# Altium PCB 32最小系统板.PcbDoc
Units mil, origin at the board's own origin, x right, y up, seen from the top; angles counter-clockwise.
Board outline 2100 x 900 mil, 2 copper layers (Top Layer, Bottom Layer); 14 components, 51 nets, 127 pads, 17 vias.
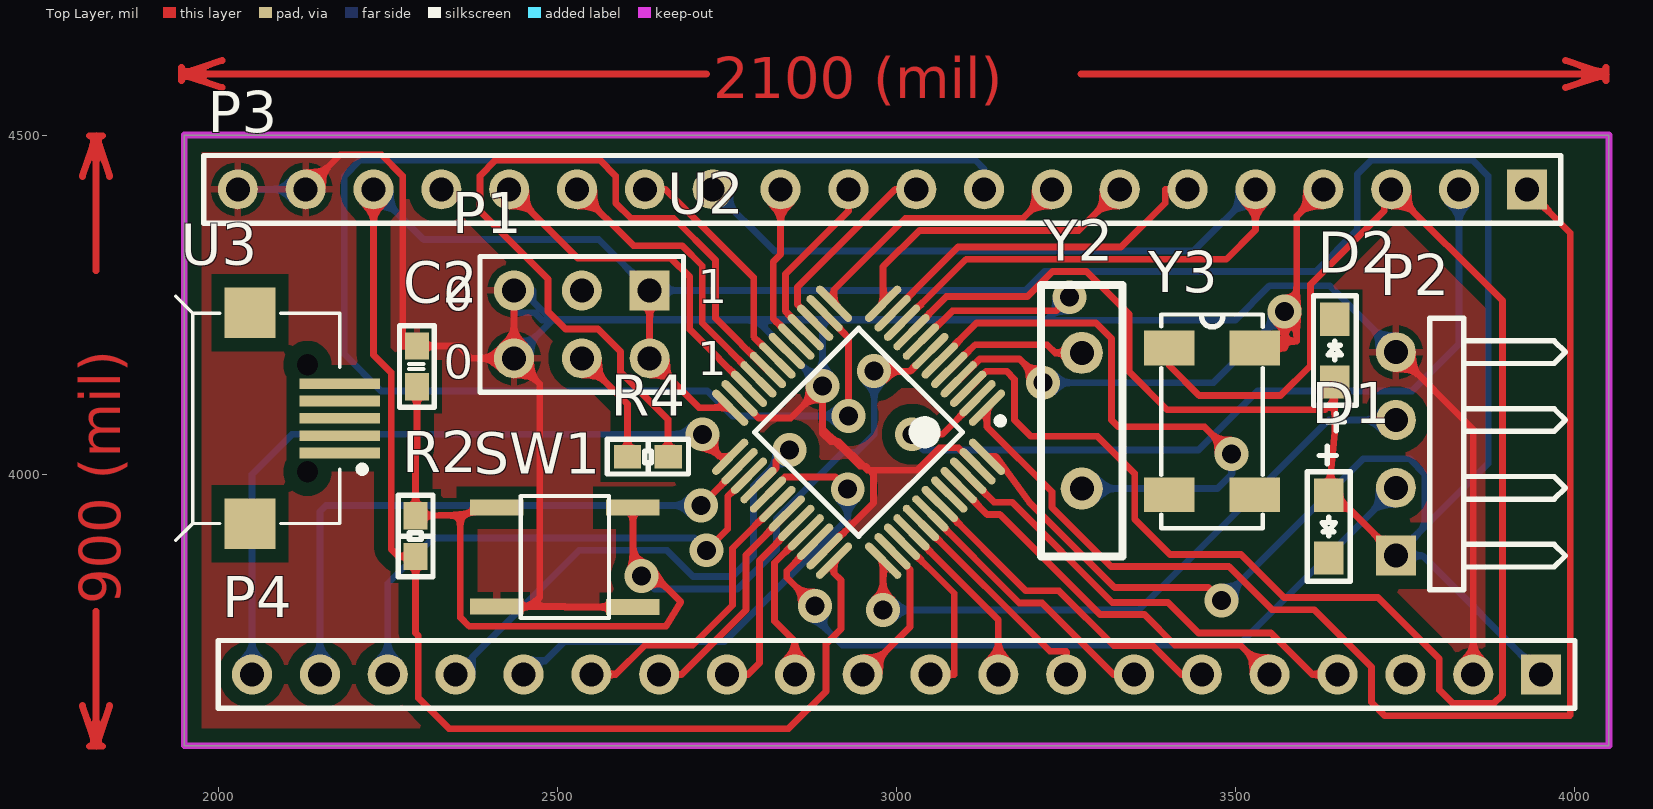
[diagram p0: Top Layer view]
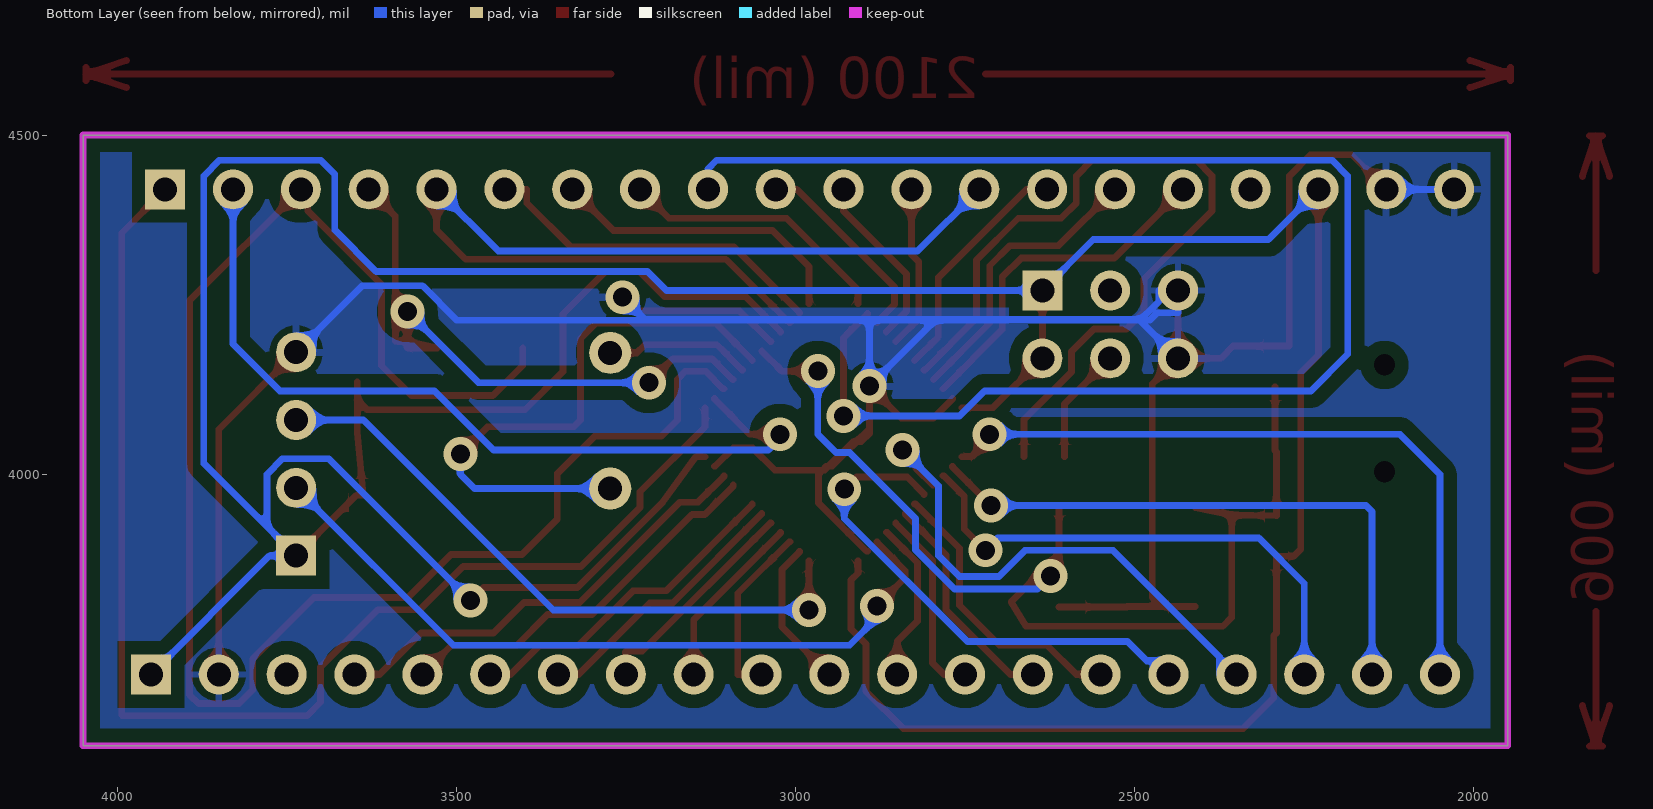
[diagram p1: Bottom Layer view, seen from below]

## Layer stack, top to bottom
Top Solder: solder mask 0.4, Solder Resist, Dk 3.5
Top Layer: signal copper 1.4
Dielectric 1: dielectric 12.6, FR-4, Dk 4.8
Bottom Layer: signal copper 1.4
Bottom Solder: solder mask 0.4, Solder Resist, Dk 3.5

## Board outline
1950,3600 4050,3600 4050,4500 1950,4500

## Design rules (kind name [scope] priority, off if disabled: settings)
Clearance [All] p1: gap=20 ignorepadtopadclearanceinfootprint=FALSE
PolygonConnect [All] p1: connectstyle=Relief reliefconductorwidth=10 reliefentries=4 polygonreliefangle="90 Angle" airgapwidth=10
RoomDefinition 32最小系统板 [InComponentClass('32最小系统板')] p1: confinementstyle=ConfineIn formatcopy=TRUE lockcomponents=FALSE outline 0,0 2000,0 2000,1000 0,1000
RoutingVias [All] p1: holewidth=28 width=50 viastyle="Through Hole" minholewidth=28 minwidth=50 maxholewidth=28 maxwidth=50
SolderMaskExpansion [All] p1: expansion=4 istentingtop=FALSE
Width [All] p1: maxlimit=10 minlimit=10 preferedwidth=10
30 further rules are at their usual default settings.

## Components (designator, comment, footprint, x,y, rotation, side; value= is the part's Value field where it differs from the comment)
C2 "105,0603" C0603 2293,4159 r270 top value=104
D1 "LED" LED 3637,3923 r90 top
D2 "LED" LED 3646,4182.26 r270 top
P1 "Header 3X2" HDR2X3 2636,4271 r180 top
P2 "SWD" HDR1X4H 3736,3880 r90 top
P3 "Header 20" HDR1X20 3929,4420 r180 top
P4 "Header 20" HDR1X20 3950,3705 r180 top
R2 "10K,0603" R0603 2291,3909 r270 top
R4 "10K,0603" R0603 2633.48,4026 r0 top
SW1 "SW-PB_V" KEY-SMT 2511,3878 r0 top
U2 "STM32F103C8T6" 48P 2944,4062 r225 top
U3 "USB-mrico" Micro_USB 2113.1,4082.49 r270 top
Y2 "8MHz" XTAL1 3273,4179 r270 top
Y3 "32.768K" MC-306 3465,4078 r270 top

## Footprints (in the part's own frame and the unit in brackets; to place one, negate y for a bottom-side part, rotate by r counter-clockwise, add the part's x,y. Pads: shape width x height; smd on the part's side, far side on the other; paste and mask are expansions set on the pad)
48P [mm]
  oval 1.8x0.3 smd: 1(-4.05,2.75) 2(-4.05,2.25) 3(-4.05,1.75) 4(-4.05,1.25) 5(-4.05,0.75) 6(-4.05,0.25) 7(-4.05,-0.25) 8(-4.05,-0.75) 9(-4.05,-1.25) 10(-4.05,-1.75) 11(-4.05,-2.25) 12(-4.05,-2.75) 25(4.05,-2.75) 26(4.05,-2.25) 27(4.05,-1.75) 28(4.05,-1.25) 29(4.05,-0.75) 30(4.05,-0.25) 31(4.05,0.25) 32(4.05,0.75) 33(4.05,1.25) 34(4.05,1.75) 35(4.05,2.25) 36(4.05,2.75)
  oval 0.3x1.8 smd: 13(-2.75,-4.05) 14(-2.25,-4.05) 15(-1.75,-4.05) 16(-1.25,-4.05) 17(-0.75,-4.05) 18(-0.25,-4.05) 19(0.25,-4.05) 20(0.75,-4.05) 21(1.25,-4.05) 22(1.75,-4.05) 23(2.25,-4.05) 24(2.75,-4.05) 37(2.75,4.05) 38(2.25,4.05) 39(1.75,4.05) 40(1.25,4.05) 41(0.75,4.05) 42(0.25,4.05) 43(-0.25,4.05) 44(-0.75,4.05) 45(-1.25,4.05) 46(-1.75,4.05) 47(-2.25,4.05) 48(-2.75,4.05)
  silkscreen extent -4.17,-2.75 2.75,3.57, body extent -3.5,-3.5 3.5,3.5, height 1.6
C0603 [mil]
  rect 40x35 smd: 1(-29.92,0) 2(29.92,0)
  silkscreen extent -60,-26 60,26
HDR1X4H [mm] "Connector; Header; 4 Position; Right Angle"
  rect 1.5x1.5 hole 0.9: 1(0,0)
  round 1.5 hole 0.9: 2(2.54,0) 3(5.08,0) 4(7.62,0)
  silkscreen extent -1.27,-6.35 8.89,-1.27
HDR1X20 [mm] "Connector; Header; 20 Position"
  rect 1.5x1.5 hole 0.9: 1(0,0)
  round 1.5 hole 0.9: 2(2.54,0) 3(5.08,0) 4(7.62,0) 5(10.16,0) 6(12.7,0) 7(15.24,0) 8(17.78,0) 9(20.32,0) 10(22.86,0) 11(25.4,0) 12(27.94,0) 13(30.48,0) 14(33.02,0) 15(35.56,0) 16(38.1,0) 17(40.64,0) 18(43.18,0) 19(45.72,0) 20(48.26,0)
  silkscreen extent -1.27,-1.27 49.53,1.27
HDR2X3 [mm] "Connector; Header; 3x2 Position"
  rect 1.5x1.5 hole 0.9: 1(0,0)
  round 1.5 hole 0.9: 2(0,2.54) 3(2.54,0) 4(2.54,2.54) 5(5.08,0) 6(5.08,2.54)
  silkscreen extent -1.27,-1.27 6.35,3.81
KEY-SMT [mm]
  rect 2x0.6 smd: 1(-2.55,-1.85) 1(2.55,-1.87) 2(-2.55,1.85) 2(2.55,1.85)
  silkscreen extent -1.65,-2.29 1.65,2.29
LED [mil]
  rect 49x43 smd: 1(46.26,0) 2(-46.26,0)
  silkscreen extent -81,-31 118,31
MC-306 [mm]
  rect 1.3x1.9 smd: 1(-2.75,-1.6) 2(2.75,-1.6) 3(2.75,1.6) 4(-2.75,1.6)
  silkscreen extent -4,-1.9 4,1.9
Micro_USB [mm]
  rect 0.4x3 smd: 1(1.3,1.679) 2(0.65,1.679) 3(0,1.679) 4(-0.65,1.679) 5(-1.3,1.679)
  round 0 hole 0.8 unplated: MH1(2,0.471) MH2(-2,0.471)
  rect 1.9x1.9 smd: ""(-3.95,-1.679) ""(3.95,-1.679)
  silkscreen extent -4.57,-4.46 4.57,2.64
R0603 [mil]
  rect 40x35 smd: 1(-29.92,0) 2(29.92,0)
  silkscreen extent -60,-26 60,26
XTAL1 [mil]
  round 62 hole 35.43: 1(0,0) 2(200,0)
  silkscreen extent -100,-60 300,60

## Part data
C2: library part Cap, "Capacitor", LatestRevisionDate=17-Jul-2002, LatestRevisionNote="Re-released for DXP Platform.", Published=8-Jun-2000, Publisher="Altium Limited"
P1: "Header, 3-Pin, Dual row", LatestRevisionDate=17-Jul-2002, LatestRevisionNote="Re-released for DXP Platform.", Publisher="Altium Limited"
P2: library part "Header 4", "Header, 4-Pin", LatestRevisionDate=17-Jul-2002, LatestRevisionNote="Re-released for DXP Platform.", Publisher="Altium Limited"
P3 P4: "Header, 20-Pin", LatestRevisionDate=17-Jul-2002, LatestRevisionNote="Re-released for DXP Platform.", Publisher="Altium Limited"
R2 R4: library part Res2, "Resistor", LatestRevisionDate=17-Jul-2002, LatestRevisionNote="Re-released for DXP Platform.", Published=8-Jun-2000, Publisher="Altium Limited"
SW1: "SWITCH"
U3: library part usb-STM
Y2 Y3: library part XTAL, "Crystal Oscillator", LatestRevisionDate=17-Jul-2002, LatestRevisionNote="Re-released for DXP Platform.", Published=8-Jun-2000, Publisher="Altium Limited"

## Via types
v1: diameter 50, hole 28, Top Layer to Bottom Layer, 17 vias

## Nets (pads, with @x,y where several pads share a name; then routed paths per layer and width w, separated by ;. In a path a pad name is that pad's centre, name@x,y a point inside that pad or via, vN(x,y) a via of type N, cw(c..) or ccw(c..) an arc to the next point about the centre after c; other vN are vias at no path point)
5v: P4.3
BOOT0: U2.44
BOOT1: R4.2 U2.20 | length 1192.7
  Top Layer w10: R4.2 2663,4026.4 2663,4081 2593,4151 2593,4181 2560,4214 2512,4214 2486,4240 2486,4288 2386,4388 2386,4440 2409,4463 2563,4463 2586,4440 2586,4400 2608.53,4377.47 2671.58,4377.47 2733,4316.05 2733,4230.14 2809.27,4153.87 U2.20
GND: C2.1 P1.5 P1.6 P2.4 P3.19 P3.20 P4.2 SW1.1 U2.8 U2.23 U2.35 U2.47 | length 5478.2
  Top Layer w10: P3.19 2180,4471 2241,4471 2272,4440 2272,4188.92 C2.1 2355,4188.92 2372.92,4171 P1.6 ; SW1.1@2410.61,3805.17 2460,3805.17 ; P1.5 P1.6 ; SW1.1@2611.39,3804.38 2511.58,3804.38 2510.79,3805.17 2460,3805.17 ; U2.23 2768.62,4111.01 2796.63,4083 2844,4083 v1(2891,4130) 2891,4067 ; U2.35 2894.99,3886.62 2966,3957.63 2966,4000 2960,4006 ; U2.8 3036.97,4195.63 3082.34,4241 3235,4241 v1(3255,4261) ; U2.47 3118.29,4011.89 3091.18,4039 3063,4039 3030,4006 2960,4006 ; P2.4 3850,4066 P4.2 ; P1.6 2474,4133 2474,3819.17 2460,3805.17 ; 2891,4067 2910,4048 ; 2891,4067 2891,4060 2903,4048 2910,4048 ; 2910,4048 2915,4048 2951,4012 ; 2910,4048 2946,4012 2951,4012 ; 2951,4012 2957,4006 2960,4006 ; 2951,4012 2954,4012 2960,4006
  Bottom Layer w10: P3.20 P3.19 ; P1.6 2492,4227 ; v1(3255,4261) 3222,4228 2491,4228 ; P2.4 3638,4278 3550,4278 3499,4227 2891,4227 ; 2491,4227 2492,4227 ; 2491,4227 2478,4227 2467,4238 2436,4238 P1.5 2464,4271 2464,4255 2491,4228 ; 2491,4227 2491,4228 ; 2491,4228 2492,4227 ; 2492,4227 2794,4227 ; 2794,4227 2891,4227 ; 2794,4227 v1(2891,4130) 2891,4227
NetC7_2: 
NetD1_K: D1.2
NetD2_K: D2.2
NetP1_3: P1.3
NetP1_4: P1.4 R4.1 | length 173
  Top Layer w10: P1.4 2603.56,4103.44 R4.1
NetR9_2: 
NetR11_2: 
NRST: P3.17
OSCIN: U2.5 Y2.1 | length 215.7
  Top Layer w10: U2.5 3078.73,4153.87 3115.86,4191 3222,4191 3234,4179 Y2.1
OSCOUT: U2.6 Y2.2 | length 863.7
  Top Layer w10: U2.6 3063.71,4168.89 3117.82,4223 3294,4223 3317,4200 3317,4080 3327,4070 3454,4070 v1(3494,4030)
  Bottom Layer w10: Y2.2 3473,3979 3494,4000 v1(3494,4030)
PA0: P3.5 P3.13 U2.10 | length 1512.9
  Top Layer w10: U2.10 3009.13,4223.47 3102.66,4317 3486,4317 3529,4360 P3.5
  Bottom Layer w10: P3.13 2820,4329 3438,4329 P3.5
PA1: P3.6 U2.11 | length 522.9
  Top Layer w10: U2.11 2994.11,4238.48 3090.63,4335 3331,4335 3396,4400 3396,4420 P3.6
PA2: P3.7 U2.12 | length 450.8
  Top Layer w10: U2.12 2980.19,4306.06 3033.6,4359.47 3268.47,4359.47 P3.7
PA3: P3.8 U2.13 | length 403.2
  Top Layer w10: U2.13 2907.81,4272 3013.28,4377.47 3186.47,4377.47 P3.8
PA4: P3.9 U2.14 | length 2197.5
  Top Layer w10: U2.14 2893.89,4236.29 2929,4201.18 v1(2929,4086)
  Bottom Layer w10: v1(2929,4086) 2758,4086 2721,4123 2240,4123 2186,4177 2186,4440 2209,4463 3116,4463 3129,4450 P3.9
PA5: P3.10 U2.15 | length 297.9
  Top Layer w10: U2.15 2879.97,4224.56 2854.1,4250.43 2854.1,4276.1 2998,4420 P3.10
PA6: P3.11 U2.16 | length 261.3
  Top Layer w10: U2.16 2866.05,4210.64 2836.1,4240.59 2836.1,4295.17 2929,4388.07 P3.11
PA7: P3.12 U2.17 | length 243
  Top Layer w10: P3.12 2829,4324.07 2818.1,4313.17 2818.1,4229.66 U2.17
PA8: P4.16 U2.29 | length 764.4
  Top Layer w10: U2.29 2810.37,3971.23 2835.14,3996 2910,3996 v1(2928,3978)
  Bottom Layer w10: P4.16 2450,3725 2482,3725 2510.37,3753.37 2746.37,3753.37 2928,3935 v1(2928,3978)
PA9: P4.15 U2.30 | length 427.6
  Top Layer w10: P4.15 2586,3705 2629,3748 2699,3748 2758,3807 2758,3891.02 2823.19,3956.21 U2.30
PA10: P4.14 U2.31 | length 334.6
  Top Layer w10: P4.14 2683,3705 2778,3800 2778,3880.98 2838.21,3941.19 U2.31
PA11: P4.13 U2.32 | length 283.8
  Top Layer w10: P4.13 2781,3705 2797.84,3721.84 2797.84,3872.98 2852.13,3927.27 U2.32
PA12: P4.12 U2.33 | length 241.5
  Top Layer w10: P4.12 2850,3753.67 2820.14,3783.53 2820.14,3869.64 2864.95,3914.45 U2.33
PA15: P4.11 U2.38 | length 221.3
  Top Layer w10: P4.11 3020,3775 3020,3859.63 2994.11,3885.52 U2.38
PB0: U2.18
PB1: P3.14 U2.19 | length 351
  Top Layer w10: P3.14 2659.47,4420 2789.38,4290.09 2789.38,4202.7 U2.19
PB3: P4.10 U2.39 | length 263.1
  Top Layer w10: U2.39 3009.13,3900.53 3085,3824.66 3085,3705 P4.10
PB4: P4.9 U2.40 | length 262.5
  Top Layer w10: U2.40 3021.95,3913.36 3150,3785.3 P4.9
PB5: P4.8 U2.41 | length 326.7
  Top Layer w10: U2.41 3036.97,3928.37 3226.15,3739.19 3250,3739.19 P4.8
PB6: P4.7 U2.42 | length 399.1
  Top Layer w10: U2.42 3049.79,3941.19 3180.83,3810.16 3214.59,3810.16 3319.75,3705 P4.7
PB7: P4.6 U2.43 | length 491
  Top Layer w10: U2.43 3063.71,3955.11 3190.6,3828.22 3239.45,3828.22 3320.14,3747.53 3377.47,3747.53 3420,3705 P4.6
PB8: P4.5 U2.45 | length 574.7
  Top Layer w10: U2.45 3091.55,3982.95 3133.54,3940.96 3152.17,3940.96 3299.94,3793.19 3365.34,3793.19 3410.53,3748 3507,3748 P4.5
PB9: P4.4 U2.46 | length 666.5
  Top Layer w10: U2.46 3105.47,3996.87 3143.38,3958.96 3170.13,3958.96 3317.9,3811.19 3400,3811.19 3445.19,3766 3552,3766 3613,3705 P4.4
PB10: P3.15 U2.21 | length 433
  Top Layer w10: P3.15 2612,4337 2684,4337 2713.57,4307.43 2713.57,4222.83 U2.21
PB11: P3.16 U2.22 | length 520.7
  Top Layer w10: P3.16 2530,4319 2667,4319 2695.26,4290.74 2695.26,4213.3 U2.22
PB12: P4.20 U2.25 | length 1042.1
  Top Layer w10: v1(2714,4059) 2714,4051.81 2740,4025.81 U2.25
  Bottom Layer w10: P4.20 2050,4000 2109,4059 v1(2714,4059)
PB13: P4.19 U2.26 | length 887
  Top Layer w10: v1(2711.82,3954) 2768.62,4010.79 U2.26
  Bottom Layer w10: P4.19 2150,3945 2159,3954 v1(2711.82,3954)
PB14: P4.18 U2.27 | length 775.7
  Top Layer w10: v1(2720,3888) 2751,3919 2751,3967.53 2781.44,3997.97 U2.27
  Bottom Layer w10: P4.18 2250,3839 2317,3906 2702,3906 v1(2720,3888)
PB15: P4.17 U2.28 | length 810.2
  Top Layer w10: U2.28 2797.55,3984.05 2822.32,4008.82 2822.32,4020 2838.32,4036 v1(2842,4036)
  Bottom Layer w10: P4.17 2375,3705 2375,3731 2532,3888 2661.46,3888 2700,3849.46 2758.46,3849.46 2789,3880 2789,3983 v1(2842,4036)
PC13: P3.2 U2.2 | length 1233.2
  Top Layer w10: v1(3023,4059) 3067.37,4059 3119.38,4111.01 U2.2
  Bottom Layer w10: v1(3023,4059) 3020,4056 3040,4036 3445,4036 3532,4123 3760,4123 3829,4192 P3.2
PC14: P3.3 U2.3 Y3.1 | length 2506.8
  Top Layer w10: U2.3 3106.56,4126.03 3132.53,4152 3162,4152 3174,4140 3174,4080 3198,4056 3296,4056 3351,4001 3351,3933.96 3402.96,3882 3507.76,3882 3571.26,3818.5 3709.5,3818.5 3800,3728 3800,3682 3820,3662 3880,3662 3893,3675 3893,4256 P3.3 3719,4420 3719,4389 3610,4280 3610,4160 3566,4116 3446,4116 3402,4160 Y3.1
PC15: P3.4 U2.4 Y3.4 | length 951.6
  Top Layer w10: U2.4 3092.64,4139.95 3122.7,4170 3181,4170 v1(3216,4135) ; v1(3572,4240) 3572,4196.27 ; P3.4 3590,4381 3590,4196.27 3572,4196.27 ; 3572,4196.27 3572,4186.27 Y3.4 3572,4196.27
  Bottom Layer w10: v1(3216,4135) 3467,4135 v1(3572,4240)
RESET: C2.2 R2.1 SW1.2 U2.7 | length 1679.8
  Top Layer w10: C2.2 2293,4035 2291,4033 R2.1 2357,3940 ; SW1.2@2410.61,3950.83 2357,3940 ; SW1.2@2611.39,3950.83 2611.39,3882.61 ; v1(2624,3850) 2611.39,3862.61 2611.39,3882.61 ; v1(2967,4152) 3020.08,4152 U2.7 ; 2357,3940 2357,3789 2370,3776 2660,3776 2682,3812 2611.39,3882.61
  Bottom Layer w10: v1(2624,3850) 2643,3831 2765.46,3831 2823,3888.54 2823,3935 2920,4032 2940,4032 2967,4059 v1(2967,4152)
SWDCLK: P2.3 U2.37 | length 944.5
  Top Layer w10: v1(2980.19,3800) U2.37
  Bottom Layer w10: v1(2980.19,3800) 3357,3800 3637,4080 P2.3
SWDIO: P2.2 U2.34 | length 1115.9
  Top Layer w10: U2.34 2879.97,3899.44 2838.14,3857.6 2838.14,3847.86 v1(2880,3806)
  Bottom Layer w10: v1(2880,3806) 2880,3788 2920,3748 3504,3748 P2.2
VBAT: P3.1 U2.1 | length 1910.4
  Top Layer w10: U2.1 3133.3,4070 3229,3974.3 3229,3951 3316,3864 3489.76,3864 3553.26,3800.5 3615.5,3800.5 3700,3716 3700,3664 3720,3644 3992,3644 3993,3645 3993,4356 P3.1
VCC3V3: D1.1 D2.1 P1.1 P1.2 P2.1 P3.18 P4.1 R2.2 U2.9 U2.24 U2.36 U2.48 | length 6652.2
  Top Layer w10: P3.18 2229,4176 2255,4150 2255,3890 2265.92,3879.08 R2.2 2291,3766 2295,3762 2295,3670 2340,3625 2841,3625 2896,3680 2896,3750 2918,3772 2918,3844 2907.81,3854.19 U2.36 ; P1.1 P1.2 2708.81,4098.19 U2.24 ; U2.9 3021.95,4210.64 3073.3,4262 3193,4262 3230,4299 3280,4299 3342.77,4236.23 3342.77,4151.23 3399,4095 3631,4095 3646,4110 ; U2.48 3146.65,4025.81 3195.5,3959.04 3321.47,3833.08 3459.92,3833.08 v1(3479.04,3813.96) ; D2.1 3646,4110 ; P2.1 3646.74,3969.26 D1.1 3646,4062 3646,4110
  Bottom Layer w10: P3.18 2303,4346 2561,4346 P1.1 3190,4271 3218,4299 3618,4299 3679,4360 3679,4442 3700,4463 3849,4463 3872,4440 3872,4016 3779,3923 ; v1(3479.04,3813.96) 3688.08,4023 3756,4023 3779,4000 3779,3923 ; P4.1 3775,3880 P2.1 3779,3923
pads on no net: U3. U3.1 U3.2 U3.3 U3.4 U3.5 U3.MH1 U3.MH2 Y3.2 Y3.3
copper on no net: | length 2532.3
  Top Layer w10: 1800,3659.08 1820,3599.08 ; 1800,4439.08 1820,4499.08 ; 1810,3599.08 1830,3599.08 ; 1810,4499.08 1830,4499.08 ; 1820,3798.15 1820,3599.08 ; 1820,4300 1820,4499.08 ; 1840,3659.08 1820,3599.08 ; 1840,4439.08 1820,4499.08 ; 1945.92,4580 1945.92,4600 ; 2005.92,4570 1945.92,4590 ; 2005.92,4610 1945.92,4590 ; 2720,4590 1945.92,4590 ; 3271.83,4590 4045.92,4590 ; 3985.92,4570 4045.92,4590 ; 3985.92,4610 4045.92,4590 ; 4045.92,4580 4045.92,4600

## Polygon pours and split planes (outlines as drawn)
GND on Top Layer "GND_L01_P000" (solid, remove dead copper, pour order 0): 1950,3600 1950,4500 4050,4500 4050,3600
GND on Bottom Layer "GND_L02_P001" (solid, remove dead copper, pour order 1): 1950,3600 1950,4500 4050,4500 4050,3600

## Keep-outs
Keep-Out Layer:
  the board outline again, w10

## Other copper
Top Layer:
  text "2100 (mil)" at 2730,4554.01 h60
  text "900 (mil)" at 1855.99,3808.15 h60 r90

## Text inside footprints (layer, text, board x,y; h text height)
P1: Top Overlay "1" at 2707.15,4251.87 h50; Top Overlay "1" at 2706,4146 h50; Top Overlay "0" at 2376,4291 h50 r180; Top Overlay "0" at 2376,4191 h50 r180